# Altium PCB Sona IF573_PCB_Footprint.PcbDoc
Units mm, origin at the board's own origin, x right, y up, seen from the top; angles counter-clockwise.
Board outline 13 x 18 mm, 2 copper layers (Top Layer, Bottom Layer); 1 components, 0 nets, 108 pads, 0 vias.
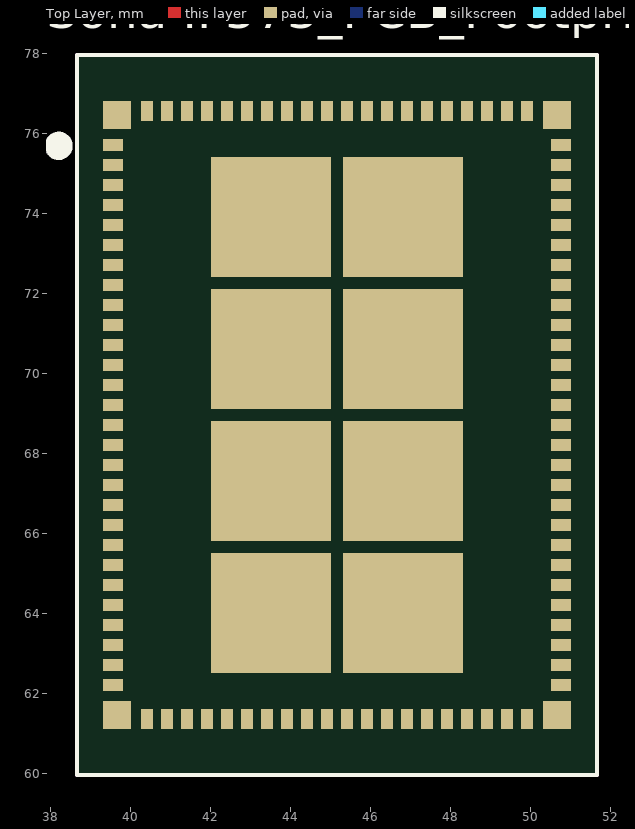
[diagram p0: Top Layer view]
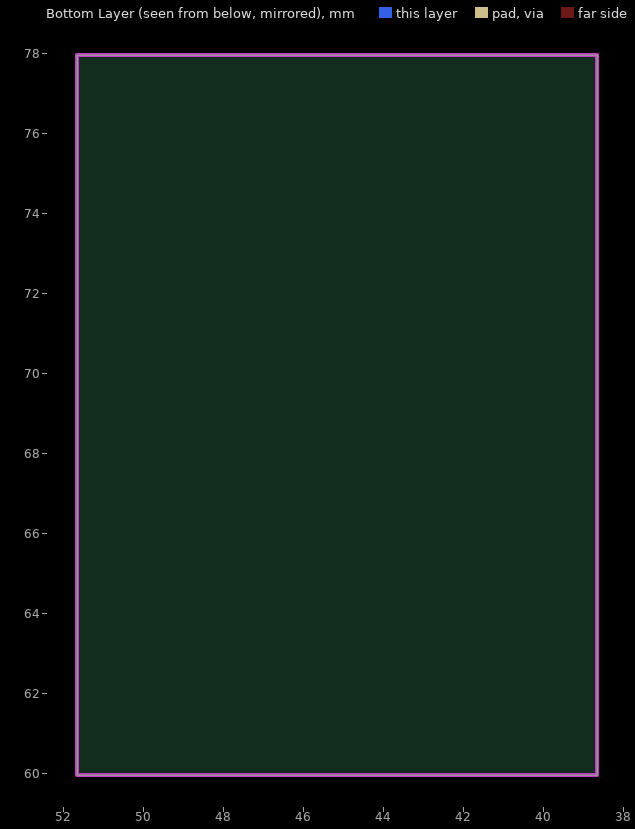
[diagram p1: Bottom Layer view, seen from below]

## Layer stack, top to bottom
Top Solder: solder mask 0.0102, Solder Resist, Dk 3.5
Top Layer: signal copper 0.0356
Dielectric 1: dielectric 0.32, FR-4, Dk 4.8
Bottom Layer: signal copper 0.0356
Bottom Solder: solder mask 0.0102, Solder Resist, Dk 3.5

## Board outline
38.659,59.968 38.659,77.968 51.659,77.968 51.659,59.968

## Design rules (kind name [scope] priority, off if disabled: settings)
Clearance [All] p1: gap=0.254 ignorepadtopadclearanceinfootprint=FALSE except(0: Arc-Hole Track-Hole SMDPad-Hole THPad-Hole Via-Hole Fill-Hole Poly-Hole Region-Hole Text-Hole)
PolygonConnect [All] p1: connectstyle=Relief reliefconductorwidth=0.254 reliefentries=4 polygonreliefangle="90 Angle" airgapwidth=0.254
RoutingVias [All] p1: holewidth=0.711 width=1.27 viastyle="Through Hole" minholewidth=0.711 minwidth=1.27 maxholewidth=0.711 maxwidth=1.27
SolderMaskExpansion [All] p1: expansion=0.102 istentingtop=FALSE
Width [All] p1: maxlimit=0.254 minlimit=0.254 preferedwidth=0.254
30 further rules are at their usual default settings.

## Components (designator, comment, footprint, x,y, rotation, side; value= is the part's Value field where it differs from the comment)
"Sona IF573_PCB_Footprint" "Platform Side" "Laird, LWB6 & LWB6+ Module, Platform Side" 45.159,68.968 r0 top value=453-00117 (schematic designator MOD1)

## Footprints (in the part's own frame and the unit in brackets; to place one, negate y for a bottom-side part, rotate by r counter-clockwise, add the part's x,y. Pads: shape width x height; smd on the part's side, far side on the other; paste and mask are expansions set on the pad)
"Laird, LWB6 & LWB6+ Module, Platform Side" [mm] "Laird, LWB6 & LWB6+ Module, Platform Side"
  rect 0.5x0.3 smd mask+0.051: 1(-5.6,6.75) 2(-5.6,6.25) 3(-5.6,5.75) 4(-5.6,5.25) 5(-5.6,4.75) 6(-5.6,4.25) 7(-5.6,3.75) 8(-5.6,3.25) 9(-5.6,2.75) 10(-5.6,2.25) 11(-5.6,1.75) 12(-5.6,1.25) 13(-5.6,0.75) 14(-5.6,0.25) 15(-5.6,-0.25) 16(-5.6,-0.75) 17(-5.6,-1.25) 18(-5.6,-1.75) 19(-5.6,-2.25) 20(-5.6,-2.75) 21(-5.6,-3.25) 22(-5.6,-3.75) 23(-5.6,-4.25) 24(-5.6,-4.75) 25(-5.6,-5.25) 26(-5.6,-5.75) 27(-5.6,-6.25) 28(-5.6,-6.75) 49(5.6,-6.75) 50(5.6,-6.25) 51(5.6,-5.75) 52(5.6,-5.25) 53(5.6,-4.75) 54(5.6,-4.25) 55(5.6,-3.75) 56(5.6,-3.25) 57(5.6,-2.75) 58(5.6,-2.25) 59(5.6,-1.75) 60(5.6,-1.25) 61(5.6,-0.75) 62(5.6,-0.25) 63(5.6,0.25) 64(5.6,0.75) 65(5.6,1.25) 66(5.6,1.75) 67(5.6,2.25) 68(5.6,2.75) 69(5.6,3.25) 70(5.6,3.75) 71(5.6,4.25) 72(5.6,4.75) 73(5.6,5.25) 74(5.6,5.75) 75(5.6,6.25) 76(5.6,6.75)
  rect 0.3x0.5 smd mask+0.051: 29(-4.75,-7.6) 30(-4.25,-7.6) 31(-3.75,-7.6) 32(-3.25,-7.6) 33(-2.75,-7.6) 34(-2.25,-7.6) 35(-1.75,-7.6) 36(-1.25,-7.6) 37(-0.75,-7.6) 38(-0.25,-7.6) 39(0.25,-7.6) 40(0.75,-7.6) 41(1.25,-7.6) 42(1.75,-7.6) 43(2.25,-7.6) 44(2.75,-7.6) 45(3.25,-7.6) 46(3.75,-7.6) 47(4.25,-7.6) 48(4.75,-7.6) 77(4.75,7.6) 78(4.25,7.6) 79(3.75,7.6) 80(3.25,7.6) 81(2.75,7.6) 82(2.25,7.6) 83(1.75,7.6) 84(1.25,7.6) 85(0.75,7.6) 86(0.25,7.6) 87(-0.25,7.6) 88(-0.75,7.6) 89(-1.25,7.6) 90(-1.75,7.6) 91(-2.25,7.6) 92(-2.75,7.6) 93(-3.25,7.6) 94(-3.75,7.6) 95(-4.25,7.6) 96(-4.75,7.6)
  rect 0.7x0.7 smd mask+0.051: G1(-5.5,7.5) G2(-5.5,-7.5) G3(5.5,-7.5) G4(5.5,7.5)
  rect 3x3 smd mask+0.051: G5(-1.65,4.95) G6(-1.65,1.65) G7(-1.65,-1.65) G8(-1.65,-4.95) G9(1.65,4.95) G10(1.65,1.65) G11(1.65,-1.65) G12(1.65,-4.95)
  silkscreen extent -7.12,-9 6.5,9, body extent -5.85,-7.85 5.85,7.85, height 0.01

## Part data
"Sona IF573_PCB_Footprint": library part CMP-MOD-453-00050-1.9, "Module, LWB6+, MIMO, MHF4", MANUFACTURER=Laird, Manufacturer Part Number=453-00117, Mounting=SMT, Substitutes Allowed=NO

## Nets (pads, with @x,y where several pads share a name; then routed paths per layer and width w, separated by ;. In a path a pad name is that pad's centre, name@x,y a point inside that pad or via, vN(x,y) a via of type N, cw(c..) or ccw(c..) an arc to the next point about the centre after c; other vN are vias at no path point)
pads on no net: "Sona IF573_PCB_Footprint.1" "Sona IF573_PCB_Footprint.2" "Sona IF573_PCB_Footprint.3" "Sona IF573_PCB_Footprint.4" "Sona IF573_PCB_Footprint.5" "Sona IF573_PCB_Footprint.6" "Sona IF573_PCB_Footprint.7" "Sona IF573_PCB_Footprint.8" "Sona IF573_PCB_Footprint.9" "Sona IF573_PCB_Footprint.10" "Sona IF573_PCB_Footprint.11" "Sona IF573_PCB_Footprint.12" "Sona IF573_PCB_Footprint.13" "Sona IF573_PCB_Footprint.14" "Sona IF573_PCB_Footprint.15" "Sona IF573_PCB_Footprint.16" "Sona IF573_PCB_Footprint.17" "Sona IF573_PCB_Footprint.18" "Sona IF573_PCB_Footprint.19" "Sona IF573_PCB_Footprint.20" "Sona IF573_PCB_Footprint.21" "Sona IF573_PCB_Footprint.22" "Sona IF573_PCB_Footprint.23" "Sona IF573_PCB_Footprint.24" "Sona IF573_PCB_Footprint.25" "Sona IF573_PCB_Footprint.26" "Sona IF573_PCB_Footprint.27" "Sona IF573_PCB_Footprint.28" "Sona IF573_PCB_Footprint.29" "Sona IF573_PCB_Footprint.30" "Sona IF573_PCB_Footprint.31" "Sona IF573_PCB_Footprint.32" "Sona IF573_PCB_Footprint.33" "Sona IF573_PCB_Footprint.34" "Sona IF573_PCB_Footprint.35" "Sona IF573_PCB_Footprint.36" "Sona IF573_PCB_Footprint.37" "Sona IF573_PCB_Footprint.38" "Sona IF573_PCB_Footprint.39" "Sona IF573_PCB_Footprint.40" "Sona IF573_PCB_Footprint.41" "Sona IF573_PCB_Footprint.42" "Sona IF573_PCB_Footprint.43" "Sona IF573_PCB_Footprint.44" "Sona IF573_PCB_Footprint.45" "Sona IF573_PCB_Footprint.46" "Sona IF573_PCB_Footprint.47" "Sona IF573_PCB_Footprint.48" "Sona IF573_PCB_Footprint.49" "Sona IF573_PCB_Footprint.50" "Sona IF573_PCB_Footprint.51" "Sona IF573_PCB_Footprint.52" "Sona IF573_PCB_Footprint.53" "Sona IF573_PCB_Footprint.54" "Sona IF573_PCB_Footprint.55" "Sona IF573_PCB_Footprint.56" "Sona IF573_PCB_Footprint.57" "Sona IF573_PCB_Footprint.58" "Sona IF573_PCB_Footprint.59" "Sona IF573_PCB_Footprint.60" "Sona IF573_PCB_Footprint.61" "Sona IF573_PCB_Footprint.62" "Sona IF573_PCB_Footprint.63" "Sona IF573_PCB_Footprint.64" "Sona IF573_PCB_Footprint.65" "Sona IF573_PCB_Footprint.66" "Sona IF573_PCB_Footprint.67" "Sona IF573_PCB_Footprint.68" "Sona IF573_PCB_Footprint.69" "Sona IF573_PCB_Footprint.70" "Sona IF573_PCB_Footprint.71" "Sona IF573_PCB_Footprint.72" "Sona IF573_PCB_Footprint.73" "Sona IF573_PCB_Footprint.74" "Sona IF573_PCB_Footprint.75" "Sona IF573_PCB_Footprint.76" "Sona IF573_PCB_Footprint.77" "Sona IF573_PCB_Footprint.78" "Sona IF573_PCB_Footprint.79" "Sona IF573_PCB_Footprint.80" "Sona IF573_PCB_Footprint.81" "Sona IF573_PCB_Footprint.82" "Sona IF573_PCB_Footprint.83" "Sona IF573_PCB_Footprint.84" "Sona IF573_PCB_Footprint.85" "Sona IF573_PCB_Footprint.86" "Sona IF573_PCB_Footprint.87" "Sona IF573_PCB_Footprint.88" "Sona IF573_PCB_Footprint.89" "Sona IF573_PCB_Footprint.90" "Sona IF573_PCB_Footprint.91" "Sona IF573_PCB_Footprint.92" "Sona IF573_PCB_Footprint.93" "Sona IF573_PCB_Footprint.94" "Sona IF573_PCB_Footprint.95" "Sona IF573_PCB_Footprint.96" "Sona IF573_PCB_Footprint.G1" "Sona IF573_PCB_Footprint.G2" "Sona IF573_PCB_Footprint.G3" "Sona IF573_PCB_Footprint.G4" "Sona IF573_PCB_Footprint.G5" "Sona IF573_PCB_Footprint.G6" "Sona IF573_PCB_Footprint.G7" "Sona IF573_PCB_Footprint.G8" "Sona IF573_PCB_Footprint.G9" "Sona IF573_PCB_Footprint.G10" "Sona IF573_PCB_Footprint.G11" "Sona IF573_PCB_Footprint.G12"

## Keep-outs
Keep-Out Layer:
  the board outline again, w0.102